# Altium PCB Dawn.PcbDoc (part 1 of 2)
Units mil, origin at the board's own origin, x right, y up, seen from the top; angles counter-clockwise.
Board outline 1650 x 2050 mil, 4 copper layers (Top Layer, Internal Plane 1, Internal Plane 2, Bottom Layer), stack 63.387 mil thick; 91 components, 58 nets, 282 pads, 207 vias.
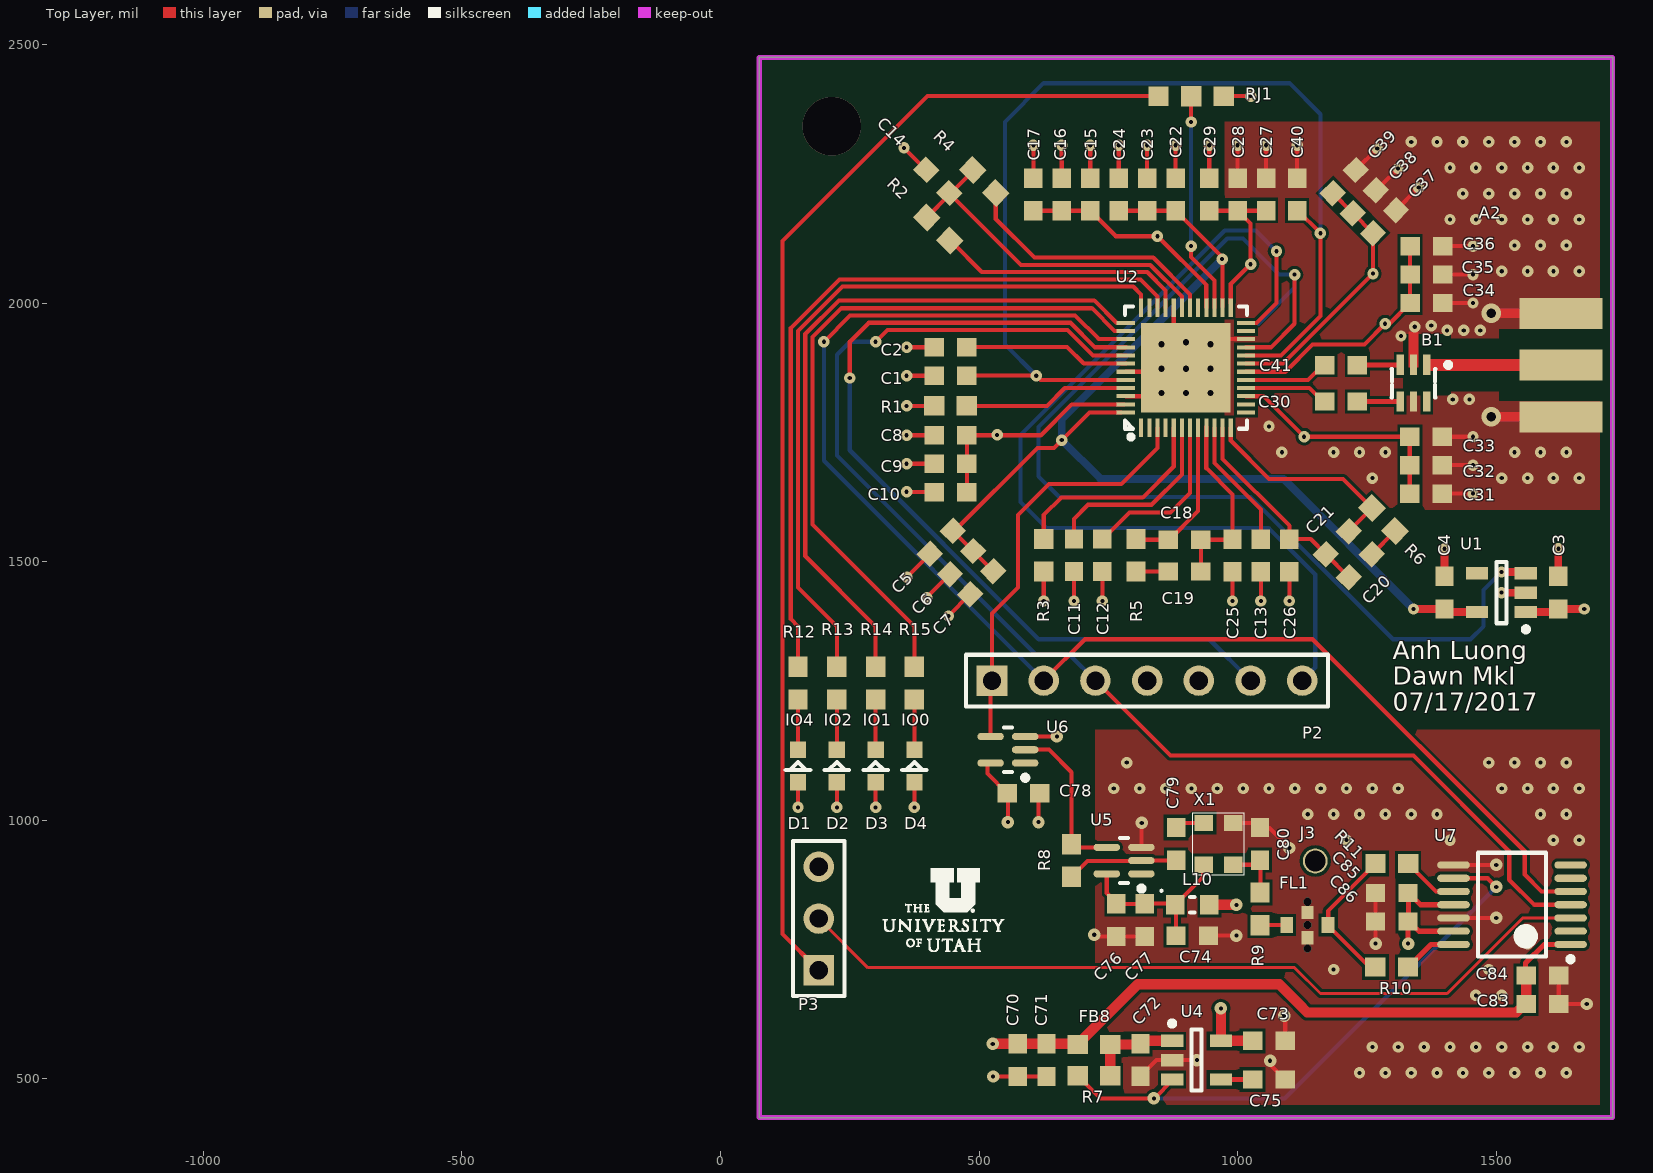
[diagram p0: Top Layer view]
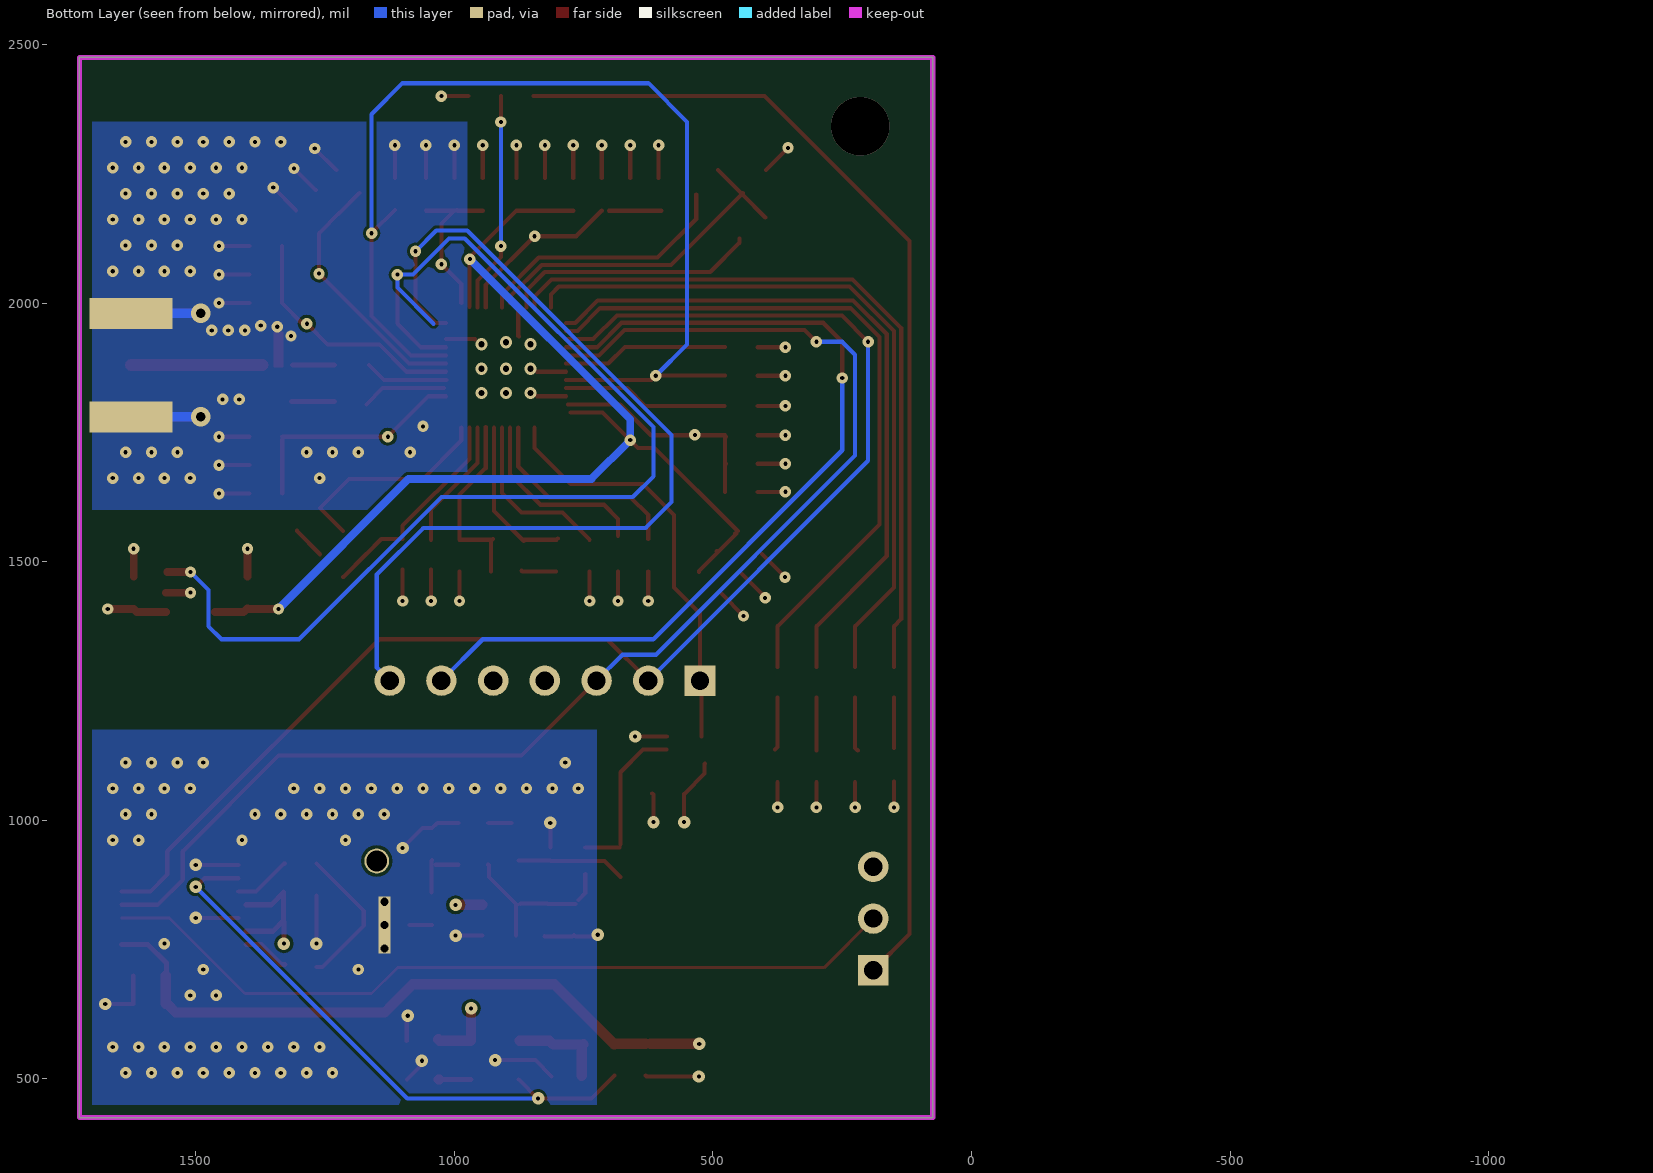
[diagram p1: Bottom Layer view, seen from below]
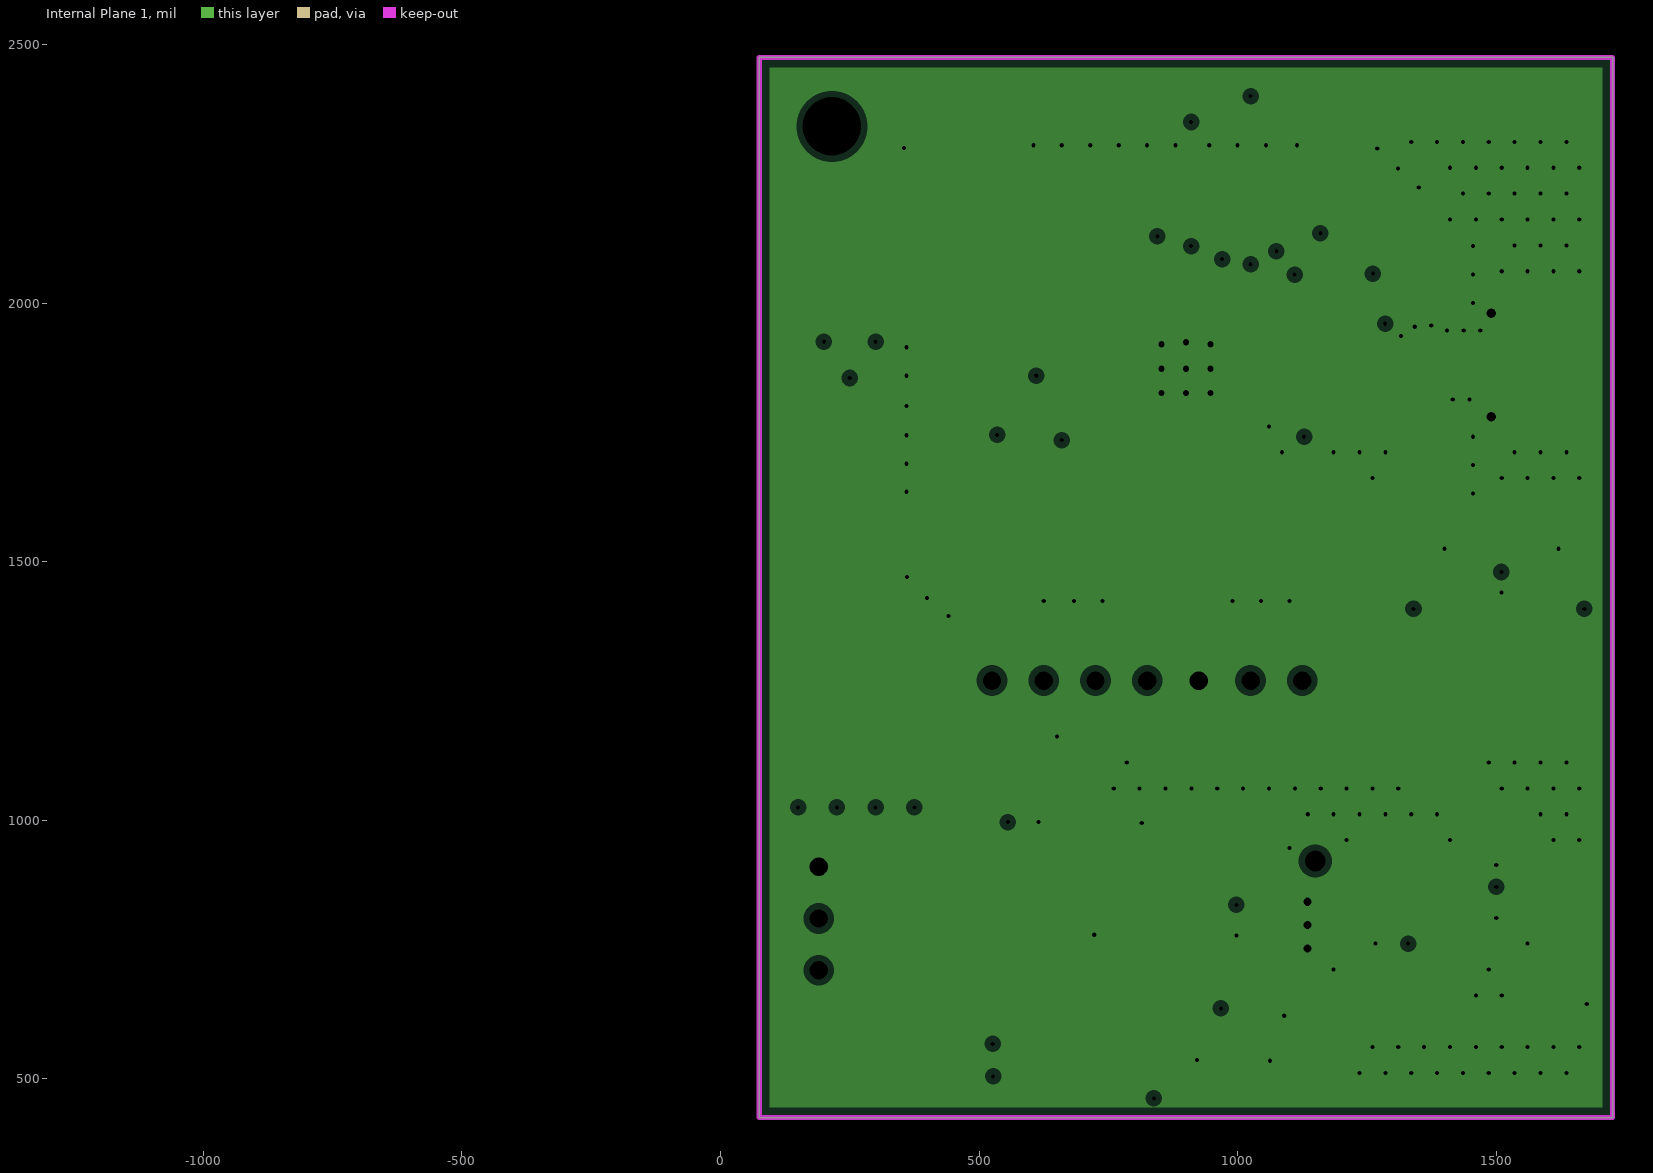
[diagram p2: Internal Plane 1, clearances drawn from the general rule]
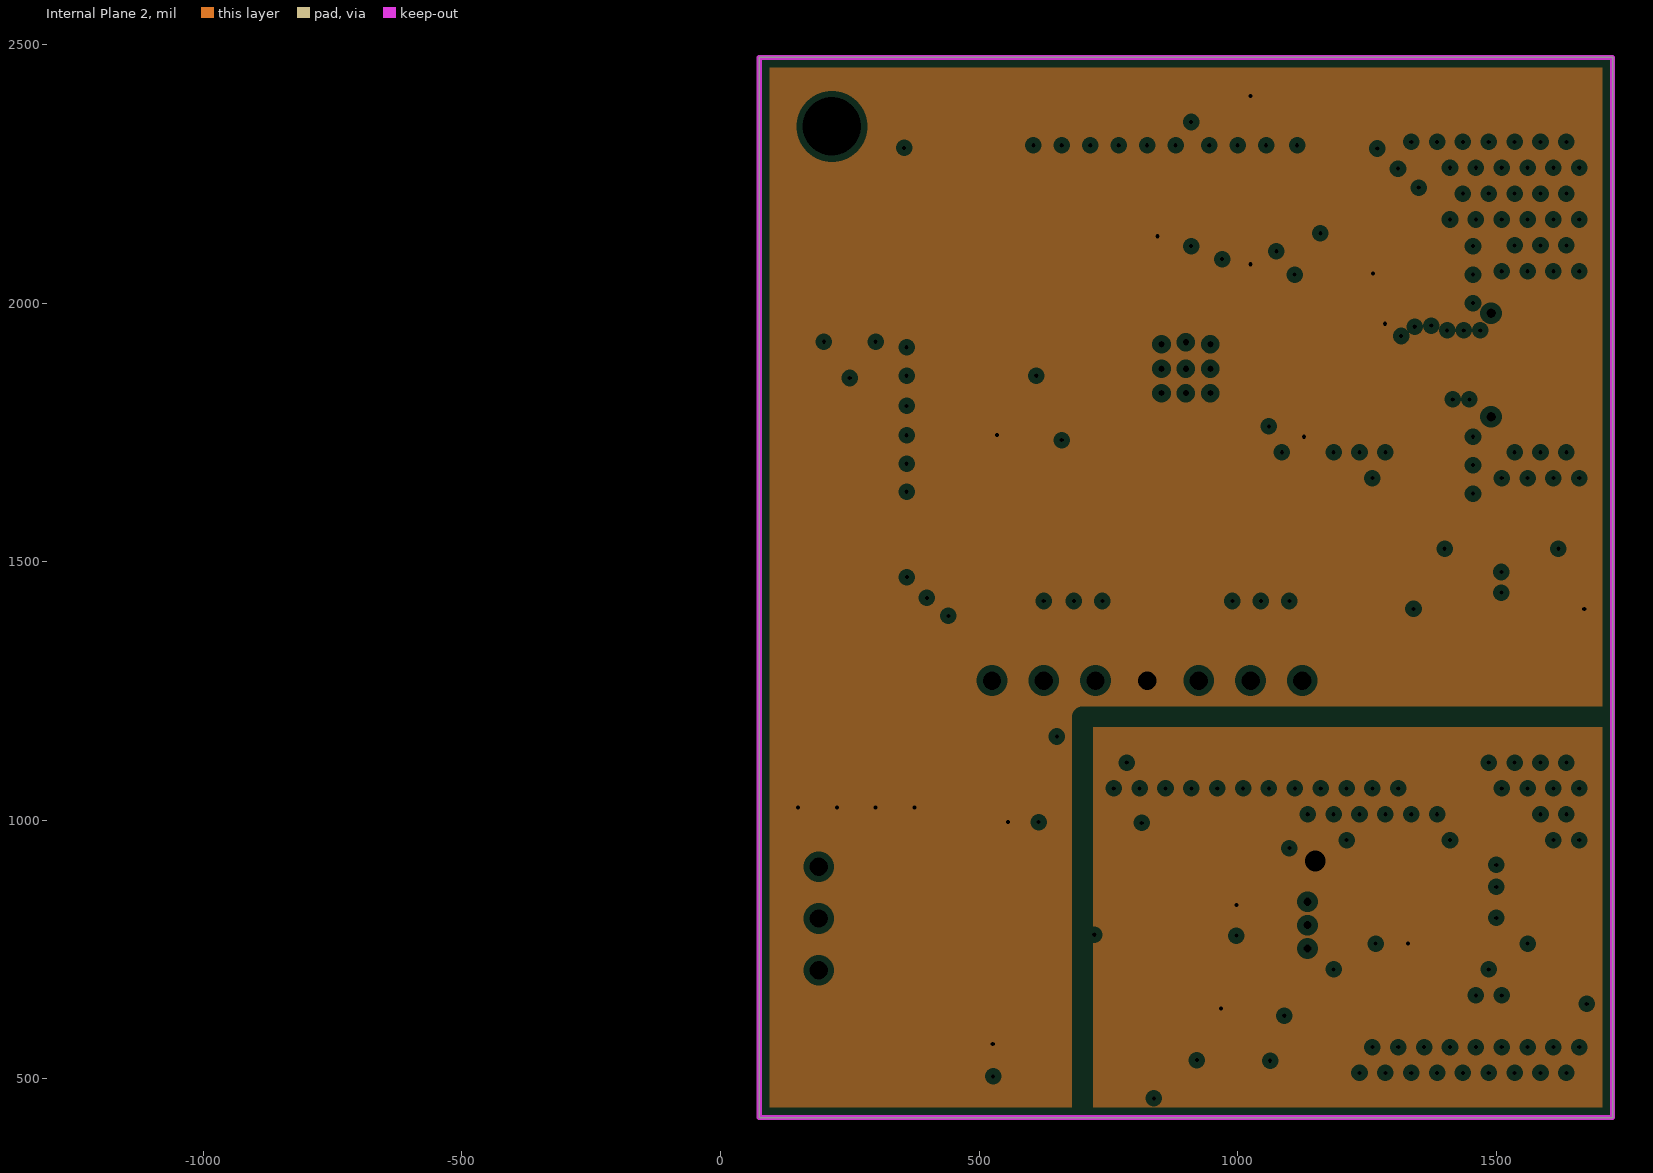
[diagram p3: Internal Plane 2, clearances drawn from the general rule]

## Layer stack, top to bottom
Top Solder: solder mask 0.039, Solder Resist, Dk 3.5
Top Layer: signal copper 1.378
Dielectric1: prepreg 14.961, ML 4, Dk 4.2
Internal Plane 1: plane copper 1.378, net GND
Dielectric2: prepreg 27.953, ML 4, Dk 4.2
Internal Plane 2: plane copper 1.378, net 3V3
Dielectric3: prepreg 14.961, ML 4, Dk 4.2
Bottom Layer: signal copper 1.378
Bottom Solder: solder mask 0.039, Solder Resist, Dk 3.5

## Board outline
75,425 75,2475 1725,2475 1725,425

## Design rules (kind name [scope] priority, off if disabled: settings)
Clearance Shielding [InPolygon vs InNet('ANT')] p1: gap=40 ignorepadtopadclearanceinfootprint=TRUE
Clearance "Clearance~Sunstone Circuits" [All] p2: gap=6 ignorepadtopadclearanceinfootprint=FALSE except(0: Arc-Hole Track-Hole SMDPad-Hole THPad-Hole Via-Hole Fill-Hole Poly-Hole Region-Hole Text-Hole) // Sunstone Circuits Minimum Clearance Rule (MLB~4&6 Layer Designs)
Clearance [All] p3: gap=8 ignorepadtopadclearanceinfootprint=FALSE except(0: Arc-Hole Track-Hole SMDPad-Hole THPad-Hole Via-Hole Fill-Hole Poly-Hole Region-Hole Text-Hole; 6: Arc-SMDPad Track-SMDPad SMDPad-SMDPad)
HoleSize "HoleSize~Sunstone Circuits" [All] p1: absolutevalues=TRUE maxlimit=251 minlimit=8 maxpercent=80.000 minpercent=20.000 // Sunstone Circuits Hole Size Rule (MLB~4&6 Layer Designs)
HoleSize Testpoint [All] p2: absolutevalues=TRUE maxlimit=100 minlimit=1 maxpercent=80.000 minpercent=20.000
HoleSize TestPointUsage [All] p3: absolutevalues=TRUE maxlimit=100 minlimit=1 maxpercent=80.000 minpercent=20.000
HoleSize [All] p4: absolutevalues=TRUE maxlimit=100 minlimit=1 maxpercent=80.000 minpercent=20.000
MinimumAnnularRing "MinimumAnnularRing~Sunstone Circuits" [All] p1: minimumring=7 // Sunstone Circuits Minimum Annular Ring (MLB~4&6 Layer Designs)
PlaneClearance "PlaneClearance~Sunstone Circuits" [All] p1: clearance=12 // Sunstone Circuits Power Plane Clearance Rule (MLB~4&6 Layer Designs)
PlaneClearance [All] p2: clearance=20
PlaneConnect [All] p1: planeconnectstyle=Direct reliefexpansion=20 reliefentries=4 reliefconductorwidth=10 reliefairgap=10
PlaneConnect "PlaneConnect~Sunstone Circuits" [All] p2: planeconnectstyle=Relief reliefexpansion=10 reliefentries=4 reliefconductorwidth=8 reliefairgap=10 // Sunstone Circuits Power Plane Connect Rule (MLB~4&6 Layer Designs)
PolygonConnect Stitch [IsPolygon vs InNet('GND')] p1: connectstyle=Direct reliefconductorwidth=10 reliefentries=4 polygonreliefangle="90 Angle" airgapwidth=10
PolygonConnect "PolygonConnect~Sunstone Circuits" [All] p2: connectstyle=Relief reliefconductorwidth=8 reliefentries=4 polygonreliefangle="90 Angle" airgapwidth=10 // Sunstone Circuits Polygon Connect Style (MLB~4&6 Layer Designs)
PolygonConnect [All] p3: connectstyle=Relief reliefconductorwidth=10 reliefentries=4 polygonreliefangle="90 Angle" airgapwidth=10
RoutingVias "RoutingVias~Sunstone Circuits" [All] p1: holewidth=16 width=30 viastyle="Through Hole" minholewidth=8 minwidth=24 maxholewidth=20 maxwidth=40 // Sunstone Circuits Routing Vias Rule (MLB~4&6 Layer Designs)
RoutingVias [All] p2: holewidth=12 width=24 viastyle="Through Hole" minholewidth=5.91 minwidth=13.78 maxholewidth=12 maxwidth=24
ShortCircuit "ShortCircuit~Sunstone Circuits" [All] p1: allowed=FALSE // Sunstone Circuits Short Circuit Rule~Do Not Allow (MLB~4&6 Layer Designs)
ShortCircuit [All] p2: allowed=FALSE
SolderMaskExpansion "SolderMaskExpansion~Sunstone Circuits" [All] p1: expansion=3 // Sunstone Circuits Solder Mask Expansion Rule (MLB~4&6 Layer Designs)
SolderMaskExpansion [All] p2: expansion=4
ViasUnderSMD "ViasUnderSMD~Sunstone Circuits" [All] p1: allowed=FALSE // Sunstone Circuits Vias Under SMD~Do Not Allow (MLB~4&6 Layer Designs)
Width Antenna [InNet('ANT')] p1: maxlimit=22.84 minlimit=22.84 preferedwidth=22.84 impedancedriven=TRUE minimp=50.000000 maximp=50.000000 favimp=50.000000
Width "Width~Sunstone Circuits" [All] p2: maxlimit=100 minlimit=6 preferedwidth=10 // Sunstone Circuits Minimum Width Rule (MLB~4&6 Layer Designs)
Width [All] p3: maxlimit=40 minlimit=4 preferedwidth=16 bottomlayer_minwidth=6 minimp=50.000000 maximp=50.000000 favimp=50.000000
26 further rules are at their usual default settings.

## Classes and differential pairs
component class Dawn: A2 D1 D2 D3 D4 P2 P3 R12 R13 R14 R15 RJ1
component class DW1000: B1 C1 C2 C3 C4 C5 C6 C7 C8 C9 C10 C11 C12 C13 C14 C15 C16 C17 C18 C19 C20 C21 C22 C23 C24 C25 C26 C27 C28 C29 C30 C31 C32 C33 C34 C35 C36 C37 C38 C39 C40 C41 R1 R2 R3 R4 R5 R6 U1 U2
component class HFXO: C70 C71 C72 C73 C74 C75 C76 C77 C78 C79 C80 C83 C84 C85 C86 FB8 FL1 J3 L10 R7 R8 R9 R10 R11 U4 U5 U6 U7 X1

## Components (designator, comment, footprint, x,y, rotation, side; value= is the part's Value field where it differs from the comment)
A2 "CONSMA003.062" SMA_EDGE_MNT 1625,1880 r270 top
B1 "HHM1595A1" BALUN 1340,1845 r180 top
C1 "GRM188R71C104KA01D" "CAPC1608X08N (0603)" 445,1859.37 r0 top
C2 "GRM188R71C104KA01D" "CAPC1608X08N (0603)" 445,1914.37 r0 top
C3 "GRM188R71C104KA01D" "CAPC1608X08N (0603)" 1620,1440 r270 top
C4 "GRM188R71C104KA01D" "CAPC1608X08N (0603)" 1400,1440 r270 top
C5 "GRM188R60J106ME47D" "CAPC1608X08N (0603)" 427.22,1537.15 r45 top
C6 "GRM188R61A105KA61D" "CAPC1608X08N (0603)" 466.11,1498.26 r45 top
C7 "GRM188R71C104KA01D" "CAPC1608X08N (0603)" 505,1459.37 r45 top
C8 "GRM188R60J106ME47D" "CAPC1608X08N (0603)" 445,1744.37 r0 top
C9 "GRM188R61A105KA61D" "CAPC1608X08N (0603)" 445,1689.37 r0 top
C10 "GRM188R71C104KA01D" "CAPC1608X08N (0603)" 445,1634.37 r0 top
C11 "GRM188R71C104KA01D" "CAPC1608X08N (0603)" 683.48,1512.4 r90 top
C12 "GRM188R71C104KA01D" "CAPC1608X08N (0603)" 738.48,1512.4 r90 top
C13 "GRM188R71C104KA01D" "CAPC1608X08N (0603)" 1044.89,1512.11 r90 top
C14 "GRM188R71C104KA01D" "CAPC1608X08N (0603)" 420,2235 r315 top
C15 "GRM188R60J106ME47D" "CAPC1608X08N (0603)" 715,2210 r270 top
C16 "GRM188R61A105KA61D" "CAPC1608X08N (0603)" 660,2210 r270 top
C17 "GRM188R71C104KA01D" "CAPC1608X08N (0603)" 605,2210 r270 top
C18 "GRM1885C1H1R2CA01D" "CAPC1608X08N (0603)" 897.31,1542.4 r180 top
C19 "GRM1885C1H270JA01D" "CAPC1608X08N (0603)" 897.31,1480.91 r0 top
C20 "GRM188R71H821KA01D" "CAPC1608X08N (0603)" 1237.33,1492.06 r225 top
C21 "GRM1885C1H180JA01D" "CAPC1608X08N (0603)" 1192.79,1536.6 r225 top
C22 "GRM188R60J106ME47D" "CAPC1608X08N (0603)" 880,2210 r270 top
C23 "GRM188R61A105KA61D" "CAPC1608X08N (0603)" 825,2210 r270 top
C24 "GRM188R71C104KA01D" "CAPC1608X08N (0603)" 770,2210 r270 top
C25 "GRM188R71C104KA01D" "CAPC1608X08N (0603)" 989.89,1512.11 r90 top
C26 "GRM188R71C104KA01D" "CAPC1608X08N (0603)" 1099.89,1512.11 r90 top
C27 "GRM188R60J106ME47D" "CAPC1608X08N (0603)" 1055,2210 r270 top
C28 "GRM188R61A105KA61D" "CAPC1608X08N (0603)" 1000,2210 r270 top
C29 "GRM188R71C104KA01D" "CAPC1608X08N (0603)" 945,2210 r270 top
C30 "GRM1885C1H120JA01D" "CAPC1608X08N (0603)" 1200,1809.57 r180 top
C31 "GRM188R60J106ME47D" "CAPC1608X08N (0603)" 1364.31,1631.57 r180 top
C32 "GRM188R61A105KA61D" "CAPC1608X08N (0603)" 1364.31,1686.57 r180 top
C33 "GRM188R71C104KA01D" "CAPC1608X08N (0603)" 1364.31,1741.57 r180 top
C34 "GRM188R60J106ME47D" "CAPC1608X08N (0603)" 1365,2000 r180 top
C35 "GRM188R61A105KA61D" "CAPC1608X08N (0603)" 1365,2055 r180 top
C36 "GRM188R71C104KA01D" "CAPC1608X08N (0603)" 1365,2110 r180 top
C37 "GRM188R60J106ME47D" "CAPC1608X08N (0603)" 1283.86,2157.08 r225 top
C38 "GRM188R61A105KA61D" "CAPC1608X08N (0603)" 1244.97,2195.97 r225 top
C39 "GRM188R71C104KA01D" "CAPC1608X08N (0603)" 1206.08,2234.86 r225 top
C40 "GRM188R71C104KA01D" "CAPC1608X08N (0603)" 1115,2210 r270 top
C41 "GRM1885C1H120JA01D" "CAPC1608X08N (0603)" 1200,1880 r180 top
C70 "GRM188C81C106MA73D" "CAPC1608X08N (0603)" 574.71,536.14 r90 top
C71 "GRM188R61A105KA61D" "CAPC1608X08N (0603)" 630.51,536.14 r90 top
C72 "GRM188R60J225KE19D" "CAPC1608X08N (0603)" 812.07,536.3 r90 top
C73 "GRM188R61A105KA61D" "CAPC1608X08N (0603)" 1060.51,573.55 r180 top
C74 "GRM188R71C104KA01D" "CAPC1608X08N (0603)" 912.23,776.88 r180 top
C75 "GRM1885C1H102JA01D" "CAPC1608X08N (0603)" 1060.33,498.74 r180 top
C76 "GRM188R61A105KA61D" "CAPC1608X08N (0603)" 765.51,806.76 r90 top
C77 "GRM188R71C104KA01D" "CAPC1608X08N (0603)" 820.51,806.76 r90 top
C78 "GRM188R71C104KA01D" "CAPC1608X08N (0603)" 585.79,1051.99 r180 top
C79 "GRM1885C1H102JA01D" "CAPC1608X08N (0603)" 881.13,954.45 r270 top
C80 "GRM1885C1H102JA01D" "CAPC1608X08N (0603)" 1043.06,954.45 r270 top
C83 "GRM188R61A105KA61D" "CAPC1608X08N (0603)" 1589.16,644.82 r180 top
C84 "GRM188R71C104KA01D" "CAPC1608X08N (0603)" 1589.16,699.82 r180 top
C85 "GRM188R71C103KA01D" "CAPC1608X08N (0603)" 1297.91,859.4 r0 top
C86 "GRM188R71C104KA01D" "CAPC1608X08N (0603)" 1297.91,804.4 r0 top
D1 "LG Q971-KN-1" CHIPLED0603 150,1105 r90 top
D2 "LG Q971-KN-1" CHIPLED0603 225,1105 r90 top
D3 "LG Q971-KN-1" CHIPLED0603 300,1105 r90 top
D4 "LG Q971-KN-1" CHIPLED0603 375,1105 r90 top
FB8 "BLM18BD221SN1D" "RESC1608X06N (0603)" 722.07,566.3 r0 top
FL1 "NFM21CC223R1H3D" NFM21C 1135,797.28 r180 top
J3 "5004" TP 1150,921.29 r0 top
L10 "LQM18FN100M00D" INDC1608X08N 912.23,836.4 r0 top
P2 "Header 7" HDR1X7 525,1270 r0 top
P3 "Header 3" HDR1X3 190,710 r90 top
R1 "MCR03ERTJ104" "RESC1608X06N (0603)" 445,1801.2 r180 top
R2 "MCR03ERTJ103" "RESC1608X06N (0603)" 421.11,2143.18 r135 top
R3 "MCR03ERTJ113" "RESC1608X06N (0603)" 624.97,1512.4 r90 top
R4 "MCR03ERTJ103" "RESC1608X06N (0603)" 510,2235 r135 top
R5 "MCR03ERTJ163" "RESC1608X06N (0603)" 803.48,1512.4 r90 top
R6 "MCR03ERTJ271" "RESC1608X06N (0603)" 1282.23,1581.5 r135 top
R7 "MCR03ERTF1002" "RESC1608X06N (0603)" 722.07,506.3 r0 top value=10k
R8 "RC0603FR-071ML" "RESC1608X06N (0603)" 678.74,921.98 r90 top
R9 "RC0603FR-07100KL" "RESC1608X06N (0603)" 1043.06,828.77 r90 top
R10 "CRCW06031K00FKEA" "RESC1608X06N (0603)" 1297.77,716.13 r180 top value=1k
R11 "RC0603FR-07100KL" "RESC1608X06N (0603)" 1298.07,916.29 r180 top
R12 "MCR03ERTJ331" "RESC1608X06N (0603)" 150,1265 r90 top
R13 "MCR03ERTJ331" "RESC1608X06N (0603)" 225,1265 r90 top
R14 "MCR03ERTJ331" "RESC1608X06N (0603)" 300,1265 r90 top
R15 "MCR03ERTJ331" "RESC1608X06N (0603)" 375,1265 r90 top
RJ1 "R_J" RJ 910,2400 r180 top value=DNP
U1 "LP5907MFX-1.8/NOPB" SOT95P280X145-5N 1510,1440 r180 top
U2 "DW1000 IC" QFN-48 900,1875 r90 top
U4 "FAN2500S30X" SOT95P280X145-5N 920.51,536.14 r0 top
U5 "NC7SPU04P5X" SC70 780.41,921.98 r180 top
U6 "NC7SPU04P5X" SC70 555.79,1136.29 r180 top
U7 "MCP4922-E/ST" TSOP65P640X110-14N 1530.5,836.7 r180 top
X1 "ASVTX-12-A-40.000MHZ-H10-T" 2.5X2.0X0.9MMXTAL 963.06,954.45 r90 top

## Footprints (in the part's own frame and the unit in brackets; to place one, negate y for a bottom-side part, rotate by r counter-clockwise, add the part's x,y. Pads: shape width x height; smd on the part's side, far side on the other; paste and mask are expansions set on the pad)
2.5X2.0X0.9MMXTAL [mm]
  rect 0.8x0.9 smd: 1(-1.025,-0.725) 2(1.025,-0.725) 3(1.025,0.725) 4(-1.025,0.725)
  round 0.5 on Top Overlay: 5(-1.905,-0.813)
  silkscreen extent -1.52,-1.27 1.52,1.27, body extent -1.3,-1.06 1.3,1.04, height 0.7
BALUN [mm]
  rect 0.35x1 smd: 1(-0.65,-0.9) 2(0,-0.9) 3(0.65,-0.9) 4(0.65,0.9) 5(0,0.9) 6(-0.65,0.9)
  silkscreen extent -1.83,-1.02 1.07,0.7, body extent -1.05,-0.67 1.05,0.67, height 0.95
"CAPC1608X08N (0603)" [mm] "Chip Capacitor, 2-Leads, Body 1.60x0.80mm, IPC Medium Density"
  rect 0.95x0.9 smd: 1(-0.8,0) 2(0.8,0)
  body extent -0.85,-0.45 0.85,0.45, height 0.8
CHIPLED0603 [mm]
  rect 0.8x0.8 smd: 1(-0.8,0) 2(0.8,0)
  silkscreen extent -0.2,-0.6 0.2,0.6, body extent -0.81,-0.4 0.81,0.4, height 0.6
HDR1X3 [mm] "Connector; Header; 3 Position"
  rect 1.5x1.5 hole 0.9: 1(0,0)
  round 1.5 hole 0.9: 2(2.54,0) 3(5.08,0)
  silkscreen extent -1.27,-1.27 6.35,1.27
HDR1X7 [mm] "Connector; Header; 7 Position"
  rect 1.5x1.5 hole 0.9: 1(0,0)
  round 1.5 hole 0.9: 2(2.54,0) 3(5.08,0) 4(7.62,0) 5(10.16,0) 6(12.7,0) 7(15.24,0)
  silkscreen extent -1.27,-1.27 16.51,1.27
INDC1608X08N [mm] "Chip Inductor, 2-Leads, Body 1.60x0.80mm, IPC Medium Density"
  rect 0.91x0.96 smd: 1(-0.845,0) 2(0.845,0)
  silkscreen extent -1.56,-0.38 0.1,0.74, body extent -0.87,-0.48 0.88,0.47, height 0.8
NFM21C [mm] "EMI, 2-Leads, Body 2.00x1.25mm, IPC Medium Density"
  rect 0.625x0.8 smd: 1(-1.012,0) 3(1.013,0)
  rect 0.6x0.65 smd: 2(0,0.625) 2(0,-0.625)
  rect 0.6x2.8 smd far side: 2(0,0)
  body extent -1.1,-0.67 1.1,0.68, height 0.85
QFN-48 [mm] "48 Pin QFN"
  rect 0.9x0.2 smd mask+0.05: 1(-2.95,2.2) 2(-2.95,1.8) 3(-2.95,1.4) 4(-2.95,1) 5(-2.95,0.6) 6(-2.95,0.2) 7(-2.95,-0.2) 8(-2.95,-0.6) 9(-2.95,-1) 10(-2.95,-1.4) 11(-2.95,-1.8) 12(-2.95,-2.2) 25(2.95,-2.2) 26(2.95,-1.8) 27(2.95,-1.4) 28(2.95,-1) 29(2.95,-0.6) 30(2.95,-0.2) 31(2.95,0.2) 32(2.95,0.6) 33(2.95,1) 34(2.95,1.4) 35(2.95,1.8) 36(2.95,2.2)
  rect 0.2x0.9 smd mask+0.05: 13(-2.2,-2.95) 14(-1.8,-2.95) 15(-1.4,-2.95) 16(-1,-2.95) 17(-0.6,-2.95) 18(-0.2,-2.95) 19(0.2,-2.95) 20(0.6,-2.95) 21(1,-2.95) 22(1.4,-2.95) 23(1.8,-2.95) 24(2.2,-2.95) 37(2.2,2.95) 38(1.8,2.95) 39(1.4,2.95) 40(1,2.95) 41(0.6,2.95) 42(0.2,2.95) 43(-0.2,2.95) 44(-0.6,2.95) 45(-1,2.95) 46(-1.4,2.95) 47(-1.8,2.95) 48(-2.2,2.95)
  rect 4.4x4.4 smd paste-4.4 mask+0.05: 49(0,0)
  rect 1.3x1.3 on Top Paste mask+0.05: Paste1(0,0) Paste2(-1.45,1.45) Paste3(-1.45,-1.45) Paste4(1.45,-1.45) Paste5(1.45,1.45) Paste6(1.45,0) Paste7(-1.45,0) Paste8(0,1.45) Paste9(0,-1.45)
  silkscreen extent -3.5,-3 3,3, body extent -3,-3 3,3, height 1
"RESC1608X06N (0603)" [mm] "Chip Resistor, 2-Leads, Body 1.60x0.80mm, IPC Medium Density"
  rect 1x0.95 smd: 1(-0.8,0) 2(0.8,0)
  body extent -0.85,-0.45 0.85,0.45, height 0.55
RJ [mm] "0 Ohm Resistor Jumper"
  rect 1x0.95 smd: 1(-1.6,0) 3(1.6,0)
  rect 1x1 smd: 2(0,0)
  round 0.5 on Top Overlay: 5(-2.475,-0.825)
  body extent -1.35,-0.45 1.65,0.45, height 0.55
SC70 [mm] "TSOP, 6-Leads, Body 2.00x1.25mm, Pitch 0.65mm, IPC Medium Density"
  oval 1.3x0.35 smd: 1(-0.85,0.65) 2(-0.85,0) 3(-0.85,-0.65) 4(0.85,-0.65) 5(0.85,0.65)
  silkscreen extent -0.98,-1.1 0.2,1.5, body extent -0.7,-1.1 0.7,1.1, height 1.1
SMA_EDGE_MNT [mm]
  rect 1.52x4.06 smd: 1(0,0) 2(-2.54,0) 3(2.54,0)
  rect 1.52x4.06 smd far side: 4(-2.54,0) 5(2.54,0)
  Top Layer lines w0.457: 2.54,-3.429 2.54,0 ; -2.54,-3.429 -2.54,0
  Bottom Layer lines w0.457: 2.54,-3.429 2.54,0 ; -2.54,-3.429 -2.54,0
  body extent -3.18,-1.27 3.17,12.06, height 3.57
SOT95P280X145-5N [mm] "SOT23, 5-Leads, Body 2.90x2.80mm, Pitch 0.95mm, IPC Medium Density"
  rect 1.1x0.6 smd: 1(-1.2,0.95) 2(-1.2,0) 3(-1.2,-0.95) 4(1.2,-0.95) 5(1.2,0.95)
  silkscreen extent -1.33,-1.5 0.25,1.92, body extent -0.85,-1.5 0.85,1.5, height 1.45
TP [mm]
  round 1.22 hole 1.02: 1(0,0)
TSOP65P640X110-14N [mm] "TSOP, 14-Leads, Body 5.00x4.40mm, Pitch 0.65mm, IPC Medium Density"
  oval 1.6x0.35 smd: 1(-2.875,1.95) 2(-2.875,1.3) 3(-2.875,0.65) 4(-2.875,0) 5(-2.875,-0.65) 6(-2.875,-1.3) 7(-2.875,-1.95) 8(2.875,-1.95) 9(2.875,-1.3) 10(2.875,-0.65) 11(2.875,0) 12(2.875,0.65) 13(2.875,1.3) 14(2.875,1.95)
  silkscreen extent -3,-2.55 1.68,2.8, body extent -2.25,-2.55 2.25,2.55, height 1.1

## Part data
A2: "CONN SMA JACK 50 OHM EDGE MNT", Dielectric Material="Polytetrafluoroethylene (PTFE)", Frequency - Max=-, Housing Color=Silver, Manufacturer="Linx Technologies Inc", Operating Temperature="-65°C ~ 165°C", Body Finish=Nickel, Body Material=Brass, Cable Group=-, Category="Connectors, Interconnects", Center Contact Material="Beryllium Copper", Center Contact Plating=Gold, ComponentLink1Description=http://www.linxtechnologies.com/resources/diagrams/consma003.062.pdf, ComponentLink1URL=http://www.linxtechnologies.com/resources/diagrams/consma003.062.pdf, Connector Style=SMA, Connector Type="Jack, Female Socket", Contact Termination=Solder, Fastening Type=Threaded, Features=-, Impedance="50 Ohm", Ingress Protection=-, Manufacturer Part Number=CONSMA003.062, Mounting Type="Board Edge, End Launch", Packaging=Bulk, Pricing 1="1=3.37, 25=3.09, 100=2.81, 500=2.6125 (USD)", RoHS="RoHS Compliant", Shield Termination=Solder, Stock 1=6857, Supplier 1=Digi-Key, Voltage Rating=-
B1: "XFMR BALUN RF 3.0-8.0GHZ UWB SMD", Frequency Range="3GHz ~ 8GHz", Manufacturer="TDK Corporation", Package / Case="0805 (2012 Metric)", Supplier Part Number 1=445-3387-1-ND, Category="RF/IF and RFID", ComponentLink1Description=https://product.tdk.com/info/en/documents/data_sheet/rf_balun_hhm1595a1_en.pdf, ComponentLink1URL=https://product.tdk.com/info/en/documents/data_sheet/rf_balun_hhm1595a1_en.pdf, Impedance - Unbalanced/Balanced="50 / 100 Ohm", Insertion Loss (Max)=1.5dB, Manufacturer Part Number=HHM1595A1, Mounting Type="Surface Mount", Packaging="Cut Tape (CT)", Part Status=Active, Phase Difference="180° ±20", Pricing 1="1=1.38, 10=1.348, 100=0.7356, 250=0.66, 500=0.64626, 1000=0.4675 (USD)", Return Loss (Min)=8dB, RoHS="RoHS Compliant", Stock 1=20610, Supplier 1=Digi-Key
C1 C2 C3 C4 C7 C10 C11 C12 C13 C14 C17 C24 C25 C26 C29 C33 C36 C39 C40 C74 C77 C78 C84 C86: "CAP CER 0.1UF 16V 10% X7R 0603", Capacitance=0.1µF, Manufacturer="Murata Electronics North America", Operating Temperature="-55°C ~ 125°C", Package / Case="0603 (1608 Metric)", Ratings=-, Temperature Coefficient=X7R, Tolerance=±10%, Voltage - Rated=16V, Applications="General Purpose", Category=Capacitors, ComponentLink1Description=http://search.murata.co.jp/Ceramy/image/img/A01X/G101/ENG/GRM188R71C104KA01-01.pdf, ComponentLink1URL=http://search.murata.co.jp/Ceramy/image/img/A01X/G101/ENG/GRM188R71C104KA01-01.pdf, Features=-, Height - Seated (Max)=-, Lead Spacing=-, Lead Style=-, Manufacturer Part Number=GRM188R71C104KA01D, Mounting Type="Surface Mount, MLCC", Packaging="Cut Tape (CT)", Pricing 1="1=0.1, 10=0.019, 50=0.0102, 100=0.0086, 250=0.00704, 500=0.006, 1000=0.00468 (USD)", RoHS="RoHS Compliant", Size / Dimension="0.063\" L x 0.031\" W (1.60mm x 0.80mm)", Stock 1=1458181, Supplier 1=Digi-Key, Thickness (Max)="0.035\" (0.90mm)"
C5 C8 C15 C22 C27 C31 C34 C37: "CAP CER 10UF 6.3V 20% X5R 0603", Capacitance=10µF, Manufacturer="Murata Electronics North America", Operating Temperature="-55°C ~ 85°C", Package / Case="0603 (1608 Metric)", Ratings=-, Temperature Coefficient=X5R, Tolerance=±20%, Voltage - Rated=6.3V, Applications="General Purpose", Category=Capacitors, ComponentLink1Description=http://search.murata.co.jp/Ceramy/image/img/A01X/G101/ENG/GRM188R60J106ME47-01.pdf, ComponentLink1URL=http://search.murata.co.jp/Ceramy/image/img/A01X/G101/ENG/GRM188R60J106ME47-01.pdf, Features=-, Height - Seated (Max)=-, Lead Spacing=-, Lead Style=-, Manufacturer Part Number=GRM188R60J106ME47D, Mounting Type="Surface Mount, MLCC", Packaging=Digi-Reel®, Pricing 1="1=0.24, 10=0.2, 50=0.1126, 100=0.1, 250=0.075, 500=0.06626, 1000=0.05875 (USD)", RoHS="RoHS Compliant", Size / Dimension="0.063\" L x 0.031\" W (1.60mm x 0.80mm)", Stock 1=2128324, Supplier 1=Digi-Key, Supplier 2=Digi-Key, Thickness (Max)="0.035\" (0.90mm)"
C6 C9 C16 C23 C28 C32 C35 C38 C71 C73 C76 C83: "CAP CER 1UF 10V 10% X5R 0603", Capacitance=1.0µF, Manufacturer="Murata Electronics North America", Operating Temperature="-55°C ~ 85°C", Package / Case="0603 (1608 Metric)", Ratings=-, Temperature Coefficient=X5R, Tolerance=±10%, Voltage - Rated=10V, Applications="General Purpose", Category=Capacitors, ComponentLink1Description=http://search.murata.co.jp/Ceramy/image/img/A01X/G101/ENG/GRM188R61A105KA61-01.pdf, ComponentLink1URL=http://search.murata.co.jp/Ceramy/image/img/A01X/G101/ENG/GRM188R61A105KA61-01.pdf, Features=-, Height - Seated (Max)=-, Lead Spacing=-, Lead Style=-, Manufacturer Part Number=GRM188R61A105KA61D, Mounting Type="Surface Mount, MLCC", Packaging="Cut Tape (CT)", Pricing 1="1=0.1, 10=0.041, 50=0.0224, 100=0.019, 250=0.01552, 500=0.01328, 1000=0.01035 (USD)", RoHS="RoHS Compliant", Size / Dimension="0.063\" L x 0.031\" W (1.60mm x 0.80mm)", Stock 1=244919, Supplier 1=Digi-Key, Thickness (Max)="0.035\" (0.90mm)"
C18: "CAP CER 1.2PF 50V NP0 0603", Capacitance=1.2pF, Manufacturer="Murata Electronics North America", Operating Temperature="-55°C ~ 125°C", Package / Case="0603 (1608 Metric)", Ratings=-, Supplier Part Number 1=490-10709-1-ND, Temperature Coefficient="C0G, NP0", Tolerance=±0.25pF, Voltage - Rated=50V, Applications="General Purpose", Category=Capacitors, ComponentLink1Description=http://www.murata.com/~/media/webrenewal/support/library/catalog/products/capacitor/mlcc/c02e.pdf, ComponentLink1URL=http://www.murata.com/~/media/webrenewal/support/library/catalog/products/capacitor/mlcc/c02e.pdf, Features=-, Height - Seated (Max)=-, Lead Spacing=-, Lead Style=-, Manufacturer Part Number=GRM1885C1H1R2CA01D, Mounting Type="Surface Mount, MLCC", Packaging="Cut Tape (CT)", Part Status=Active, Pricing 1="1=0.1, 10=0.053, 50=0.0286, 100=0.0242, 250=0.0198, 500=0.01694, 1000=0.0132 (USD)", RoHS="RoHS Compliant", Size / Dimension="0.063\" L x 0.031\" W (1.60mm x 0.80mm)", Stock 1=36680, Supplier 1=Digi-Key, Thickness (Max)="0.035\" (0.90mm)"
C19: "CAP CER 27PF 50V NP0 0603", Capacitance=27pF, Manufacturer="Murata Electronics North America", Operating Temperature="-55°C ~ 125°C", Package / Case="0603 (1608 Metric)", Ratings=-, Supplier Part Number 1=490-1413-1-ND, Temperature Coefficient="C0G, NP0", Tolerance=±5%, Voltage - Rated=50V, Applications="General Purpose", Category=Capacitors, ComponentLink1Description=http://www.murata.com/~/media/webrenewal/support/library/catalog/products/capacitor/mlcc/c02e.pdf, ComponentLink1URL=http://www.murata.com/~/media/webrenewal/support/library/catalog/products/capacitor/mlcc/c02e.pdf, Features=-, Height - Seated (Max)=-, Lead Spacing=-, Lead Style=-, Manufacturer Part Number=GRM1885C1H270JA01D, Mounting Type="Surface Mount, MLCC", Packaging="Cut Tape (CT)", Part Status=Active, Pricing 1="1=0.1, 10=0.041, 50=0.0222, 100=0.0187, 250=0.01532, 500=0.0131, 1000=0.0102 (USD)", RoHS="RoHS Compliant", Size / Dimension="0.063\" L x 0.031\" W (1.60mm x 0.80mm)", Stock 1=113117, Supplier 1=Digi-Key, Thickness (Max)="0.035\" (0.90mm)"
C20: "CAP CER 820PF 50V X7R 0603", Capacitance=820pF, Manufacturer="Murata Electronics North America", Operating Temperature="-55°C ~ 125°C", Package / Case="0603 (1608 Metric)", Ratings=-, Supplier Part Number 1=490-1493-1-ND, Temperature Coefficient=X7R, Tolerance=±10%, Voltage - Rated=50V, Applications="General Purpose", Category=Capacitors, ComponentLink1Description=http://www.murata.com/~/media/webrenewal/support/library/catalog/products/capacitor/mlcc/c02e.pdf, ComponentLink1URL=http://www.murata.com/~/media/webrenewal/support/library/catalog/products/capacitor/mlcc/c02e.pdf, Features=-, Height - Seated (Max)=-, Lead Spacing=-, Lead Style=-, Manufacturer Part Number=GRM188R71H821KA01D, Mounting Type="Surface Mount, MLCC", Packaging="Cut Tape (CT)", Part Status=Active, Pricing 1="1=0.1, 10=0.067, 25=0.0476, 50=0.0364, 100=0.0308, 250=0.0252, 500=0.02156, 1000=0.0168 (USD)", RoHS="RoHS Compliant", Size / Dimension="0.063\" L x 0.031\" W (1.60mm x 0.80mm)", Stock 1=61936, Supplier 1=Digi-Key, Thickness (Max)="0.035\" (0.90mm)"
C21: "CAP CER 18PF 50V NP0 0603", Capacitance=18pF, Manufacturer="Murata Electronics North America", Operating Temperature="-55°C ~ 125°C", Package / Case="0603 (1608 Metric)", Ratings=-, Supplier Part Number 1=490-1409-1-ND, Temperature Coefficient="C0G, NP0", Tolerance=±5%, Voltage - Rated=50V, Applications="General Purpose", Category=Capacitors, ComponentLink1Description=http://www.murata.com/~/media/webrenewal/support/library/catalog/products/capacitor/mlcc/c02e.pdf, ComponentLink1URL=http://www.murata.com/~/media/webrenewal/support/library/catalog/products/capacitor/mlcc/c02e.pdf, Features=-, Height - Seated (Max)=-, Lead Spacing=-, Lead Style=-, Manufacturer Part Number=GRM1885C1H180JA01D, Mounting Type="Surface Mount, MLCC", Packaging="Cut Tape (CT)", Part Status=Active, Pricing 1="1=0.1, 10=0.041, 50=0.0222, 100=0.0187, 250=0.01532, 500=0.0131, 1000=0.0102 (USD)", RoHS="RoHS Compliant", Size / Dimension="0.063\" L x 0.031\" W (1.60mm x 0.80mm)", Stock 1=281577, Supplier 1=Digi-Key, Thickness (Max)="0.035\" (0.90mm)"
C30 C41: "CAP CER 12PF 50V NP0 0603", Capacitance=12pF, Manufacturer="Murata Electronics North America", Operating Temperature="-55°C ~ 125°C", Package / Case="0603 (1608 Metric)", Ratings=-, Supplier Part Number 1=490-1405-1-ND, Temperature Coefficient="C0G, NP0", Tolerance=±5%, Voltage - Rated=50V, Applications="General Purpose", Category=Capacitors, ComponentLink1Description=http://www.murata.com/~/media/webrenewal/support/library/catalog/products/capacitor/mlcc/c02e.pdf, ComponentLink1URL=http://www.murata.com/~/media/webrenewal/support/library/catalog/products/capacitor/mlcc/c02e.pdf, Features=-, Height - Seated (Max)=-, Lead Spacing=-, Lead Style=-, Manufacturer Part Number=GRM1885C1H120JA01D, Mounting Type="Surface Mount, MLCC", Packaging="Cut Tape (CT)", Part Status=Active, Pricing 1="1=0.1, 10=0.041, 50=0.0222, 100=0.0187, 250=0.01532, 500=0.0131, 1000=0.0102 (USD)", RoHS="RoHS Compliant", Size / Dimension="0.063\" L x 0.031\" W (1.60mm x 0.80mm)", Stock 1=151484, Supplier 1=Digi-Key, Thickness (Max)="0.035\" (0.90mm)"
C70: "CAP CER 10UF 16V 20% X6S 0603", Capacitance=10µF, Manufacturer="Murata Electronics North America", Operating Temperature="-55°C ~ 105°C", Package / Case="0603 (1608 Metric)", Ratings=-, Temperature Coefficient=X6S, Tolerance=±20%, Voltage - Rated=16V, Applications="General Purpose", Category=Capacitors, ComponentLink1Description=http://www.murata.com/products/catalog/pdf/c02e.pdf, ComponentLink1URL=http://www.murata.com/products/catalog/pdf/c02e.pdf, Features=-, Height - Seated (Max)=-, Lead Spacing=-, Lead Style=-, Manufacturer Part Number=GRM188C81C106MA73D, Mounting Type="Surface Mount, MLCC", Packaging="Cut Tape (CT)", Pricing 1="1=0.4, 10=0.349, 50=0.2118, 100=0.1744, 250=0.13952, 500=0.12708, 1000=0.11237 (USD)", RoHS="RoHS Compliant", Size / Dimension="0.063\" L x 0.031\" W (1.60mm x 0.80mm)", Stock 1=59274, Supplier 1=Digi-Key, Thickness (Max)="0.031\" (0.80mm)"
C72: "CAP CER 2.2UF 6.3V 10% X5R 0603", Capacitance=2.2µF, Manufacturer="Murata Electronics North America", Operating Temperature="-55°C ~ 85°C", Package / Case="0603 (1608 Metric)", Ratings=-, Temperature Coefficient=X5R, Tolerance=±10%, Voltage - Rated=6.3V, Applications="General Purpose", Category=Capacitors, ComponentLink1Description=http://search.murata.co.jp/Ceramy/image/img/A01X/G101/ENG/GRM188R60J225KE19-01.pdf, ComponentLink1URL=http://search.murata.co.jp/Ceramy/image/img/A01X/G101/ENG/GRM188R60J225KE19-01.pdf, Features=-, Height - Seated (Max)=-, Lead Spacing=-, Lead Style=-, Manufacturer Part Number=GRM188R60J225KE19D, Mounting Type="Surface Mount, MLCC", Packaging="Cut Tape (CT)", Pricing 1="1=0.17, 10=0.114, 50=0.0658, 100=0.0543, 250=0.04572, 500=0.0383, 1000=0.03143 (USD)", RoHS="RoHS Compliant", Size / Dimension="0.063\" L x 0.031\" W (1.60mm x 0.80mm)", Stock 1=155330, Supplier 1=Digi-Key, Thickness (Max)="0.035\" (0.90mm)"
C75 C79 C80: "CAP CER 1000PF 50V 5% NP0 0603", Capacitance=1000pF, Manufacturer="Murata Electronics North America", Operating Temperature="-55°C ~ 125°C", Package / Case="0603 (1608 Metric)", Ratings=-, Temperature Coefficient="C0G, NP0", Tolerance=±5%, Voltage - Rated=50V, Applications="General Purpose", Category=Capacitors, ComponentLink1Description=http://www.murata.com/products/catalog/pdf/c02e.pdf, ComponentLink1URL=http://www.murata.com/products/catalog/pdf/c02e.pdf, Features=-, Height - Seated (Max)=-, Lead Spacing=-, Lead Style=-, Manufacturer Part Number=GRM1885C1H102JA01D, Mounting Type="Surface Mount, MLCC", Packaging="Tape & Reel (TR)", Pricing 1="4000=0.00863, 8000=0.00788, 12000=0.0075, 28000=0.00713, 100000=0.00516 (USD)", RoHS="RoHS Compliant", Size / Dimension="0.063\" L x 0.031\" W (1.60mm x 0.80mm)", Stock 1=140000, Supplier 1=Digi-Key, Thickness (Max)="0.035\" (0.90mm)"
C85: "CAP CER 10000PF 16V 10% X7R 0603", Capacitance=10000pF, Manufacturer="Murata Electronics North America", Operating Temperature="-55°C ~ 125°C", Package / Case="0603 (1608 Metric)", Ratings=-, Temperature Coefficient=X7R, Tolerance=±10%, Voltage - Rated=16V, Applications="General Purpose", Category=Capacitors, ComponentLink1Description=http://search.murata.co.jp/Ceramy/image/img/A01X/G101/ENG/GRM188R71C103KA01-01.pdf, ComponentLink1URL=http://search.murata.co.jp/Ceramy/image/img/A01X/G101/ENG/GRM188R71C103KA01-01.pdf, Features=-, Height - Seated (Max)=-, Lead Spacing=-, Lead Style=-, Manufacturer Part Number=GRM188R71C103KA01D, Mounting Type="Surface Mount, MLCC", Packaging="Cut Tape (CT)", Pricing 1="1=0 (USD)", RoHS="RoHS Compliant", Size / Dimension="0.063\" L x 0.031\" W (1.60mm x 0.80mm)", Stock 1=0, Supplier 1=Digi-Key, Thickness (Max)="0.035\" (0.90mm)"
D1 D2 D3 D4: "LED CHIPLED 570NM GREEN 0603 SMD", Color=Green, Current - Test=20mA, Luminous Flux @ Current - Test=-, Manufacturer="OSRAM Opto Semiconductors Inc", Millicandela Rating=10mcd, Package / Case="0603 (1608 Metric)", Voltage - Forward (Vf) Typ=2.2V, Category=Optoelectronics, ComponentLink1Description=http://catalog.osram-os.com/catalogue/catalogue.do;jsessionid=DE4D071D0D2758CC117C711BF848053E?act=downloadFile&favOid=0200000600005069000100b6, ComponentLink1URL=http://catalog.osram-os.com/catalogue/catalogue.do;jsessionid=DE4D071D0D2758CC117C711BF848053E?act=downloadFile&favOid=0200000600005069000100b6, Height=0.80mm, Lens Style/Size="Rectangle with Flat Top, 1mm x 0.8mm", Lens Type=Diffused, Manufacturer Part Number="LG Q971-KN-1", Mounting Type="Surface Mount", Packaging="Tape & Reel (TR)", Pricing 1="4000=0.03632 (USD)", RoHS="RoHS Compliant", Size / Dimension="1.60mm L x 0.80mm W", Stock 1=44000, Supplier 1=Digi-Key, Viewing Angle=160°, Wavelength - Dominant=570nm, Wavelength - Peak=572nm
FB8: "FERRITE CHIP 220 OHM 200MA 0603", Current Rating=200mA, DC Resistance (DCR)="450 mOhm Max", Impedance @ Frequency="220 Ohm @ 100MHz", Manufacturer="Murata Electronics North America", Package / Case="0603 (1608 Metric)", Category=Filters, ComponentLink1Description=http://search.murata.co.jp/Ceramy/image/img/PDF/ENG/L0110S0100BLM18B.pdf, ComponentLink1URL=http://search.murata.co.jp/Ceramy/image/img/PDF/ENG/L0110S0100BLM18B.pdf, Filter Type="Differential Mode - Single", Height (Max)="0.037\" (0.95mm)", Manufacturer Part Number=BLM18BD221SN1D, Mounting Type="Surface Mount", Packaging="Cut Tape (CT)", Pricing 1="1=0.1, 10=0.087, 50=0.0712, 100=0.0523, 250=0.038, 500=0.03484, 1000=0.0301 (USD)", RoHS="RoHS Compliant", Size / Dimension="0.063\" L x 0.031\" W (1.60mm x 0.80mm)", Stock 1=35645, Supplier 1=Digi-Key
FL1: "FILTER LC HIGH FREQ 22000PF 0805", Capacitance=0.022µF, Current=2A, DC Resistance (DCR)="30 mOhm Max", Manufacturer="Murata Electronics North America", Operating Temperature="-55°C ~ 125°C", Package / Case="0805 (2012 Metric), 3 PC Pad", Voltage=50V, Category=Filters, ComponentLink1Description=http://search.murata.co.jp/Ceramy/image/img/PDF/ENG/L0111S0109NFM21C.pdf, ComponentLink1URL=http://search.murata.co.jp/Ceramy/image/img/PDF/ENG/L0111S0109NFM21C.pdf, Height (Max)="0.037\" (0.95mm)", Manufacturer Part Number=NFM21CC223R1H3D, Packaging="Tape & Reel (TR)", Pricing 1="4000=0.12353, 8000=0.11438 (USD)", RoHS="RoHS Compliant", Size / Dimension="0.079\" L x 0.049\" W (2.00mm x 1.25mm)", Stock 1=4000, Supplier 1=Digi-Key, Thread Size=-
J3: "TEST POINT PC MINI .040\"D YELLOW", Color=Yellow, Manufacturer="Keystone Electronics", Category="Test and Measurement", ComponentLink1Description=http://www.keyelco.com/product-pdf.cfm?p=1313, ComponentLink1URL=http://www.keyelco.com/product-pdf.cfm?p=1313, Manufacturer Part Number=5004, Material="Base, Nylon 46, UL 94V-0", Mounting Type="0.040\" (1.02mm) Hole Diameter", Packaging=Bulk, Pricing 1="1=0.34, 10=0.318, 50=0.232, 100=0.2228, 250=0.20008, 500=0.191, 1000=0.15916, 2500=0.14552, 5000=0.13643 (USD)", RoHS="RoHS Compliant", Stock 1=45761, Supplier 1=Digi-Key, Terminal="0.010\" x 0.020\" (0.25mm x 0.51mm) Phosphor Bronze Wire, Silver Plated", Type="PC Test Point, Miniature"
L10: "INDUCTOR 10UH 50MA 0603", Current - Saturation=-, Current Rating=50mA, DC Resistance (DCR)="900 mOhm", Frequency - Self Resonant=30MHz, Frequency - Test=1MHz, Inductance=10µH, Manufacturer="Murata Electronics North America", Operating Temperature="-55°C ~ 125°C", Package / Case="0603 (1608 Metric)", Tolerance=±20%, Category="Inductors, Coils, Chokes", ComponentLink1Description=http://search.murata.co.jp/Ceramy/image/img/PDF/ENG/L0075S0097LQM18F.pdf, ComponentLink1URL=http://search.murata.co.jp/Ceramy/image/img/PDF/ENG/L0075S0097LQM18F.pdf, Height - Seated (Max)="0.035\" (0.90mm)", Manufacturer Part Number=LQM18FN100M00D, Material - Core=-, Mounting Type="Surface Mount", Packaging="Cut Tape (CT)", Pricing 1="1=0.14, 10=0.13, 25=0.1164, 50=0.101, 100=0.0907, 250=0.08416, 500=0.0777, 750=0.07381, 1000=0.06734 (USD)", Q @ Freq=-, RoHS="RoHS Compliant", Shielding=Shielded, Size / Dimension="0.063\" L x 0.031\" W (1.60mm x 0.80mm)", Stock 1=28547, Supplier 1=Digi-Key, Supplier Device Package="0603 (1608 Metric)", Type=Multilayer
P2: "Header, 7-Pin", LatestRevisionDate=17-Jul-2002, LatestRevisionNote="Re-released for DXP Platform.", Publisher="Altium Limited"
P3: "Header, 3-Pin", LatestRevisionDate=17-Jul-2002, LatestRevisionNote="Re-released for DXP Platform.", Publisher="Altium Limited"
R1: "RES SMD 100K OHM 5% 1/10W 0603", Manufacturer="Rohm Semiconductor", Operating Temperature="-55°C ~ 155°C", Package / Case="0603 (1608 Metric)", Power (Watts)="0.1W, 1/10W", Resistance (Ohms)=100k, Supplier Device Package=0603, Supplier Part Number 1=RHM100KCGCT-ND, Temperature Coefficient=±200ppm/°C, Tolerance=±5%, Category=Resistors, ComponentLink1Description=http://rohmfs.rohm.com/en/products/databook/datasheet/passive/resistor/chip_resistor/mcr_g.pdf, ComponentLink1URL=http://rohmfs.rohm.com/en/products/databook/datasheet/passive/resistor/chip_resistor/mcr_g.pdf, Composition="Thick Film", Failure Rate=-, Features=-, Height="0.022\" (0.55mm)", Manufacturer Part Number=MCR03ERTJ104, Number of Terminations=2, Packaging="Cut Tape (CT)", Part Status=Active, Pricing 1="1=0.1, 10=0.019, 25=0.0132, 100=0.0075, 250=0.00576, 500=0.0046, 1000=0.00338 (USD)", RoHS="RoHS Compliant", Size / Dimension="0.063\" L x 0.031\" W (1.60mm x 0.80mm)", Stock 1=136580, Supplier 1=Digi-Key
R2 R4: "RES 10K OHM 1/10W 5% 0603 SMD", Manufacturer="Rohm Semiconductor", Package / Case="0603 (1608 Metric)", Power (Watts)="0.1W, 1/10W", Resistance (Ohms)=10k, Temperature Coefficient=±200ppm/°C, Tolerance=±5%, Category=Resistors, ComponentLink1Description=http://rohmfs.rohm.com/en/products/databook/datasheet/passive/resistor/chip_resistor/mcr_g.pdf, ComponentLink1URL=http://rohmfs.rohm.com/en/products/databook/datasheet/passive/resistor/chip_resistor/mcr_g.pdf, Composition="Thick Film", Features=-, Height="0.022\" (0.55mm)", Manufacturer Part Number=MCR03ERTJ103, Number of Terminations=2, Packaging="Tape & Reel (TR)", Pricing 1="5000=0.00103, 10000=0.00089, 25000=0.00078, 50000=0.00072, 125000=0.0007 (USD)", RoHS="RoHS Compliant", Size / Dimension="0.063\" L x 0.031\" W (1.60mm x 0.80mm)", Stock 1=330000, Supplier 1=Digi-Key, Supplier Device Package="0603 (1608 Metric)"
R3: "RES SMD 11K OHM 5% 1/10W 0603", Manufacturer="Rohm Semiconductor", Operating Temperature="-55°C ~ 155°C", Package / Case="0603 (1608 Metric)", Power (Watts)="0.1W, 1/10W", Resistance (Ohms)=11k, Supplier Device Package=0603, Supplier Part Number 1=RHM11KCGCT-ND, Temperature Coefficient=±200ppm/°C, Tolerance=±5%, Category=Resistors, ComponentLink1Description=http://rohmfs.rohm.com/en/products/databook/datasheet/passive/resistor/chip_resistor/mcr_g.pdf, ComponentLink1URL=http://rohmfs.rohm.com/en/products/databook/datasheet/passive/resistor/chip_resistor/mcr_g.pdf, Composition="Thick Film", Failure Rate=-, Features=-, Height="0.022\" (0.55mm)", Manufacturer Part Number=MCR03ERTJ113, Number of Terminations=2, Packaging="Cut Tape (CT)", Part Status=Active, Pricing 1="1=0.1, 10=0.019, 25=0.0132, 100=0.0075, 250=0.00576, 500=0.0046, 1000=0.00338 (USD)", RoHS="RoHS Compliant", Size / Dimension="0.063\" L x 0.031\" W (1.60mm x 0.80mm)", Stock 1=8319, Supplier 1=Digi-Key
R5: "RES SMD 16K OHM 5% 1/10W 0603", Manufacturer="Rohm Semiconductor", Operating Temperature="-55°C ~ 155°C", Package / Case="0603 (1608 Metric)", Power (Watts)="0.1W, 1/10W", Resistance (Ohms)=16k, Supplier Device Package=0603, Supplier Part Number 1=RHM16KCGCT-ND, Temperature Coefficient=±200ppm/°C, Tolerance=±5%, Category=Resistors, ComponentLink1Description=http://rohmfs.rohm.com/en/products/databook/datasheet/passive/resistor/chip_resistor/mcr_g.pdf, ComponentLink1URL=http://rohmfs.rohm.com/en/products/databook/datasheet/passive/resistor/chip_resistor/mcr_g.pdf, Composition="Thick Film", Failure Rate=-, Features=-, Height="0.022\" (0.55mm)", Manufacturer Part Number=MCR03ERTJ163, Number of Terminations=2, Packaging="Cut Tape (CT)", Part Status=Active, Pricing 1="1=0.1, 10=0.019, 25=0.0132, 100=0.0075, 250=0.00576, 500=0.0046, 1000=0.00338 (USD)", RoHS="RoHS Compliant", Size / Dimension="0.063\" L x 0.031\" W (1.60mm x 0.80mm)", Stock 1=7457, Supplier 1=Digi-Key
R6: "RES SMD 270 OHM 5% 1/10W 0603", Manufacturer="Rohm Semiconductor", Operating Temperature="-55°C ~ 155°C", Package / Case="0603 (1608 Metric)", Power (Watts)="0.1W, 1/10W", Resistance (Ohms)=270, Supplier Device Package=0603, Supplier Part Number 1=RHM270CGCT-ND, Temperature Coefficient=±200ppm/°C, Tolerance=±5%, Category=Resistors, ComponentLink1Description=http://rohmfs.rohm.com/en/products/databook/datasheet/passive/resistor/chip_resistor/mcr_g.pdf, ComponentLink1URL=http://rohmfs.rohm.com/en/products/databook/datasheet/passive/resistor/chip_resistor/mcr_g.pdf, Composition="Thick Film", Failure Rate=-, Features=-, Height="0.022\" (0.55mm)", Manufacturer Part Number=MCR03ERTJ271, Number of Terminations=2, Packaging="Cut Tape (CT)", Part Status=Active, Pricing 1="1=0.1, 10=0.019, 25=0.0132, 100=0.0075, 250=0.00576, 500=0.0046, 1000=0.00338 (USD)", RoHS="RoHS Compliant", Size / Dimension="0.063\" L x 0.031\" W (1.60mm x 0.80mm)", Stock 1=34918, Supplier 1=Digi-Key
R7: "RES SMD 10K OHM 1% 1/10W 0603", Manufacturer="Rohm Semiconductor", Operating Temperature="-55°C ~ 155°C", Package / Case="0603 (1608 Metric)", Power (Watts)="0.1W, 1/10W", Resistance (Ohms)=10k, Supplier Part Number 1=RHM10.0KCFDKR-ND, Temperature Coefficient=±100ppm/°C, Tolerance=±1%, Category=Resistors, ComponentLink1Description=http://rohmfs.rohm.com/en/products/databook/datasheet/passive/resistor/chip_resistor/mcr_g.pdf, ComponentLink1URL=http://rohmfs.rohm.com/en/products/databook/datasheet/passive/resistor/chip_resistor/mcr_g.pdf, Composition="Thick Film", Features=-, Height="0.022\" (0.55mm)", Manufacturer Part Number=MCR03ERTF1002, Number of Terminations=2, Packaging=Digi-Reel®, Pricing 1="1=0.1, 10=0.022, 25=0.016, 100=0.0089, 250=0.0068, 500=0.00542, 1000=0.00399 (USD)", RoHS="RoHS Compliant", Size / Dimension="0.063\" L x 0.031\" W (1.60mm x 0.80mm)", Stock 1=30590, Supplier 1=Digi-Key, Supplier Device Package="0603 (1608 Metric)"
R8: "RES 1.00M OHM 1/10W 1% 0603 SMD", Manufacturer=Yageo, Package / Case="0603 (1608 Metric)", Power (Watts)="0.1W, 1/10W", Resistance (Ohms)=1M, Supplier Device Package=0603, Temperature Coefficient=±100ppm/°C, Tolerance=±1%, Category=Resistors, ComponentLink1Description=http://www.yageo.com/documents/recent/PYu-RC0603_51_RoHS_L_4.pdf, ComponentLink1URL=http://www.yageo.com/documents/recent/PYu-RC0603_51_RoHS_L_4.pdf, Composition="Thick Film", Features=-, Height="0.022\" (0.55mm)", Manufacturer Part Number=RC0603FR-071ML, Number of Terminations=2, Packaging="Tape & Reel (TR)", Pricing 1="5000=0.00171, 10000=0.00149, 25000=0.00131, 50000=0.0012, 125000=0.00117 (USD)", RoHS="RoHS Compliant", Size / Dimension="0.063\" L x 0.031\" W (1.60mm x 0.80mm)", Stock 1=1280000, Supplier 1=Digi-Key
R9 R11: "RES 100K OHM 1/10W 1% 0603 SMD", Manufacturer=Yageo, Package / Case="0603 (1608 Metric)", Power (Watts)="0.1W, 1/10W", Resistance (Ohms)=100k, Supplier Device Package=0603, Temperature Coefficient=±100ppm/°C, Tolerance=±1%, Category=Resistors, ComponentLink1Description=http://www.yageo.com/documents/recent/PYu-RC0603_51_RoHS_L_4.pdf, ComponentLink1URL=http://www.yageo.com/documents/recent/PYu-RC0603_51_RoHS_L_4.pdf, Composition="Thick Film", Features=-, Height="0.022\" (0.55mm)", Manufacturer Part Number=RC0603FR-07100KL, Number of Terminations=2, Packaging="Tape & Reel (TR)", Pricing 1="5000=0.00171, 10000=0.00149, 25000=0.00131, 50000=0.0012, 125000=0.00117 (USD)", RoHS="RoHS Compliant", Size / Dimension="0.063\" L x 0.031\" W (1.60mm x 0.80mm)", Stock 1=2865000, Supplier 1=Digi-Key
R10: "RES SMD 1K OHM 1% 1/10W 0603", Manufacturer="Vishay Dale", Operating Temperature="-55°C ~ 155°C", Package / Case="0603 (1608 Metric)", Power (Watts)="0.1W, 1/10W", Resistance (Ohms)=1k, Supplier Part Number 1=541-1.00KHDKR-ND, Temperature Coefficient=±100ppm/°C, Tolerance=±1%, Category=Resistors, ComponentLink1Description=http://www.vishay.com/docs/20035/dcrcwe3.pdf, ComponentLink1URL=http://www.vishay.com/docs/20035/dcrcwe3.pdf, Composition="Thick Film", Features="Automotive AEC-Q200", Height="0.020\" (0.50mm)", Manufacturer Part Number=CRCW06031K00FKEA, Number of Terminations=2, Packaging=Digi-Reel®, Pricing 1="10=0.081, 50=0.0436, 200=0.0251, 1000=0.01711 (USD)", RoHS="RoHS Compliant", Size / Dimension="0.061\" L x 0.033\" W (1.55mm x 0.85mm)", Stock 1=1035099, Supplier 1=Digi-Key, Supplier Device Package="0603 (1608 Metric)"
R12 R13 R14 R15: "RES 330 OHM 1/10W 5% 0603 SMD", Manufacturer="Rohm Semiconductor", Package / Case="0603 (1608 Metric)", Power (Watts)="0.1W, 1/10W", Resistance (Ohms)=330, Temperature Coefficient=±200ppm/°C, Tolerance=±5%, Category=Resistors, ComponentLink1Description=http://rohmfs.rohm.com/en/products/databook/datasheet/passive/resistor/chip_resistor/mcr_g.pdf, ComponentLink1URL=http://rohmfs.rohm.com/en/products/databook/datasheet/passive/resistor/chip_resistor/mcr_g.pdf, Composition="Thick Film", Features=-, Height="0.022\" (0.55mm)", Manufacturer Part Number=MCR03ERTJ331, Number of Terminations=2, Packaging=Digi-Reel®, Pricing 1="1=0.1, 10=0.013, 25=0.0092, 100=0.0052, 250=0.00396, 500=0.00316, 1000=0.00233 (USD)", RoHS="RoHS Compliant", Size / Dimension="0.063\" L x 0.031\" W (1.60mm x 0.80mm)", Stock 1=12878, Supplier 1=Digi-Key, Supplier Device Package="0603 (1608 Metric)"
RJ1: "Resistor Jumper", Package / Case="0603 (1608 Metric)", Applications="General Purpose", Mounting Type="Surface Mount, MLCC"
U1: "IC REG LDO 1.8V 0.25A SOT23-5", Current - Limit (Min)=-, Current - Output=250mA, Manufacturer="Texas Instruments", Operating Temperature="-40°C ~ 125°C", Package / Case="SC-74A, SOT-753", Supplier Device Package=SOT-23, Supplier Part Number 1=296-41463-1-ND, Voltage - Input="2.2 V ~ 5.5 V", Voltage - Output=1.8V, Category="Integrated Circuits (ICs)", ComponentLink1Description=http://www.ti.com/lit/ds/symlink/lp5907.pdf, ComponentLink1URL=http://www.ti.com/lit/ds/symlink/lp5907.pdf, Manufacturer Part Number=LP5907MFX-1.8/NOPB, Mounting Type="Surface Mount", Number of Regulators=1, Packaging="Cut Tape (CT)", Part Status=Active, Pricing 1="1=0.57, 10=0.488, 100=0.3641, 500=0.28602, 1000=0.1575 (USD)", Regulator Topology="Positive Fixed", RoHS="RoHS Compliant", Stock 1=13246, Supplier 1=Digi-Key, Voltage - Dropout (Typical)=-
U2: library part DW1000_QFN_48, "UWB DW1000", Manufacturer="Decawave Ltd.", Part Number=DW1000_QFN, Component Code=n/a, ComponentLink1Description="Datasheet Link", Component Type=Standard
U4: "IC REG LDO 3V 0.1A SOT23-5", Current - Limit (Min)=-, Current - Output=100mA, Manufacturer="Fairchild Semiconductor", Operating Temperature="-40°C ~ 125°C", Package / Case="SC-74A, SOT-753", Supplier Device Package=SOT-23-5, Voltage - Dropout (Typical)="0.1V @ 100mA", Voltage - Input="Up to 6.5V", Voltage - Output=3V, Category="Integrated Circuits (ICs)", ComponentLink1Description=http://www.fairchildsemi.com/ds/FA/FAN2500.pdf, ComponentLink1URL=http://www.fairchildsemi.com/ds/FA/FAN2500.pdf, Manufacturer Part Number=FAN2500S30X, Mounting Type="Surface Mount", Number of Regulators=1, Packaging="Tape & Reel (TR)", Pricing 1="3000=0.25462, 6000=0.23706, 15000=0.22828, 30000=0.2195, 75000=0.21599, 150000=0.21072 (USD)", Regulator Topology="Positive Fixed", RoHS="RoHS Compliant", Stock 1=6000, Supplier 1=Digi-Key
U5 U6: "IC INVERTER ULP UNBUFF SC70-5", Current - Output High, Low="2.6mA, 2.6mA", Current - Quiescent (Max)=0.9µA, Manufacturer="Fairchild Semiconductor", Operating Temperature="-40°C ~ 85°C", Package / Case="6-TSSOP (5 Lead), SC-88A, SOT-353", Supplier Device Package=SC-70-5, Voltage - Supply="0.9 V ~ 3.6 V", Category="Integrated Circuits (ICs)", ComponentLink1Description=http://www.fairchildsemi.com/ds/NC/NC7SPU04.pdf, ComponentLink1URL=http://www.fairchildsemi.com/ds/NC/NC7SPU04.pdf, Features=-, Logic Level - High=-, Logic Level - Low=-, Logic Type=Inverter, Manufacturer Part Number=NC7SPU04P5X, Max Propagation Delay @ V, Max CL="9.2ns @ 3.3V, 30pF", Mounting Type="Surface Mount", Number of Circuits=1, Number of Inputs=1, Packaging="Tape & Reel (TR)", Pricing 1="3000=0.0798, 6000=0.07182, 15000=0.06384, 30000=0.05985, 75000=0.05307, 150000=0.05107 (USD)", RoHS="RoHS Compliant", Stock 1=24000, Supplier 1=Digi-Key
U7: "IC DAC 12BIT DUAL W/SPI 14TSSOP", Manufacturer="Microchip Technology", Operating Temperature="-40°C ~ 125°C", Package / Case="14-TSSOP (0.173\", 4.40mm Width)", Supplier Device Package=14-TSSOP, Voltage Supply Source="Single Supply", Category="Integrated Circuits (ICs)", ComponentLink1Description=http://www.microchip.com/mymicrochip/filehandler.aspx?ddocname=en547858, ComponentLink1URL=http://www.microchip.com/mymicrochip/filehandler.aspx?ddocname=en547858, Data Interface="Serial, SPI™", Manufacturer Part Number=MCP4922-E/ST, Mounting Type="Surface Mount", Number of Bits=12, Number of Converters=2, Number of Outputs and Type="2 Voltage, Unipolar; 2 Voltage, Bipolar", Packaging=Tube, Pricing 1="1=3.14, 10=2.62, 25=2.19, 100=1.99 (USD)", RoHS="RoHS Compliant", Settling Time=4.5µs, Stock 1=461, Supplier 1=Digi-Key
X1: "OSC VCTCXO 40.000MHZ SNWV SMD", Current - Supply (Disable) (Max)=-, Current - Supply (Max)=2.5mA, Frequency=40MHz, Frequency Stability=±1ppm, Manufacturer="Abracon Corporation", Operating Temperature="-30°C ~ 85°C", Package / Case="4-SMD, No Lead (DFN, LCC)", Voltage - Supply=3V, Category="Crystals and Oscillators", ComponentLink1Description=http://www.abracon.com/Oscillators/ASTX12_ASVTX12.pdf, ComponentLink1URL=http://www.abracon.com/Oscillators/ASTX12_ASVTX12.pdf, Function=-, Height="0.035\" (0.90mm)", Manufacturer Part Number=ASVTX-12-A-40.000MHZ-H10-T, Mounting Type="Surface Mount", Output="Clipped Sine Wave", Packaging="Tape & Reel (TR)", Pricing 1="1000=2.17, 3000=2.015, 5000=1.9375 (USD)", Ratings=-, RoHS="RoHS Compliant", Size / Dimension="0.098\" L x 0.079\" W (2.50mm x 2.00mm)", Stock 1=0, Supplier 1=Digi-Key, Type=VCTCXO

## Via types
v1: diameter 22, hole 8, Top Layer to Bottom Layer, tented both sides, 171 vias
v2: diameter 24, hole 8, Top Layer to Bottom Layer, tented both sides, 21 vias
v3: diameter 23.62, hole 11.81, Top Layer to Bottom Layer, 9 vias
v4: diameter 15.75, hole 15.75, Top Layer to Bottom Layer, tented both sides, 3 vias
v5: diameter 38, hole 18, Top Layer to Bottom Layer, tented both sides, 2 vias
v6: diameter 113, hole 113, Top Layer to Bottom Layer, 1 vias

## Nets (pads, with @x,y where several pads share a name; then routed paths per layer and width w, separated by ;. In a path a pad name is that pad's centre, name@x,y a point inside that pad or via, vN(x,y) a via of type N, cw(c..) or ccw(c..) an arc to the next point about the centre after c; other vN are vias at no path point)
1V8: C4.2 C5.2 C6.2 C7.2 C22.2 C23.2 C24.2 U1.5 U2.26 U2.48 | length 2281.4
  Top Layer w8: C5.2@452.11,1559.42 612.69,1720 645,1720 v1(660,1735) 713.39,1788.39 U2.48@775,1788.39 ; C5.2@454.49,1554.42 C5.2@454.77,1554.42 ; C5.2@457.11,1554.42 C5.2@454.77,1554.42 ; C6.2 C7.2 C7.2@527.27,1480 ; C6.2@492.73,1520 489.19,1520 C5.2@454.77,1554.42 ; C24.2 C23.2 C22.2@876.5,2178.5 ; C22.2 v1@970.87,2087.64 ; v1(970,2085) 970,2086.77 v1@970.87,2087.64 ; U2.26@970.87,1992.89 v1@970.87,2087.64
  Top Layer w15: v1(1340,1408.5) C4.2 ; C4.2@1400,1410 1407.4,1402.6 U1.5
  Bottom Layer w15: v1(970,2085) 660,1775 v1(660,1735) 735,1660 1088.5,1660 v1(1340,1408.5)
3V3: C3.2 C8.2 C9.2 C10.2 C15.2 C16.2 C17.2 C27.2 C28.2 C29.2 C31.2 C32.2 C33.2 C34.2 C35.2 C36.2 C37.2 C38.2 C39.2 C70.2 C71.2 C78.2 C83.2 C84.2 D1.1 D2.1 D3.1 D4.1 FB8.1 P2.4 RJ1.1 U1.1 U2.15 U2.18 U2.19 U2.25 U2.28 U2.47 U6.5 U7.1 | length 4392.4